# Altium PCB 检测板.PcbDoc
Units mm, origin at the board's own origin, x right, y up, seen from the top; angles counter-clockwise.
Board outline 95.25 x 7.4 mm, 2 copper layers (Top Layer, Bottom Layer); 16 components, 32 nets, 66 pads, 0 vias.
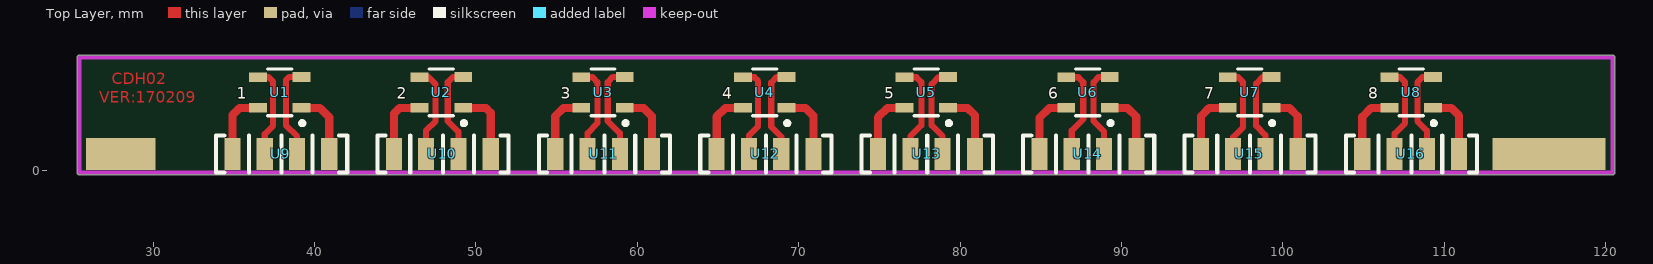
[diagram p0: Top Layer view]
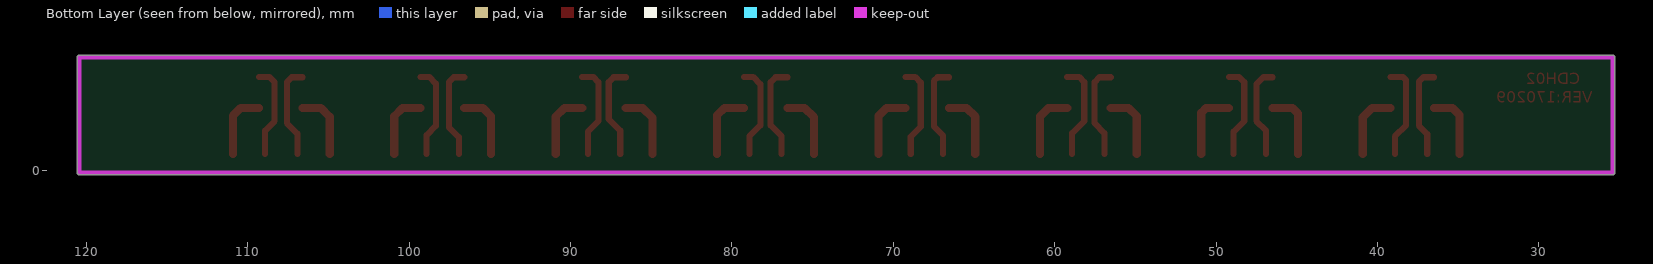
[diagram p1: Bottom Layer view, seen from below]

## Layer stack, top to bottom
Top Layer: signal copper 0.0356
Dielectric: dielectric 0.32, FR-4, Dk 4.8
Bottom Layer: signal copper 0.0356

## Board outline
25.302,-0.146 ccw(c25.43,-0.146) 25.43,-0.273 120.43,-0.273 ccw(c120.43,-0.146) 120.557,-0.146 120.557,7 ccw(c120.43,7) 120.43,7.127 25.43,7.127 ccw(c25.43,7) 25.302,7

## Design rules (kind name [scope] priority, off if disabled: settings)
Clearance [All] p1: gap=0.203
PolygonConnect [All] p1: connectstyle=Relief reliefconductorwidth=0.254 reliefentries=4 polygonreliefangle="90 Angle"
RoutingVias [All] p1: holewidth=0.711 width=1.27 viastyle="Through Hole" minholewidth=0.711 minwidth=1.27 maxholewidth=0.711 maxwidth=1.27
SilkscreenOverComponentPads [All] p1: minsilkscreentomaskgap=0.254
SolderMaskExpansion [All] p1: expansion=0.102
Width [All] p1: maxlimit=0.762 minlimit=0.254 preferedwidth=0.508
27 further rules are at their usual default settings.

## Components (designator, comment, footprint, x,y, rotation, side; value= is the part's Value field where it differs from the comment)
U1 "HW-101A" SOT-23-4 37.846,4.826 r270 top
U2 "HW-101A" SOT-23-4 47.861,4.826 r270 top
U3 "HW-101A" SOT-23-4 57.876,4.826 r270 top
U4 "HW-101A" SOT-23-4 67.891,4.826 r270 top
U5 "HW-101A" SOT-23-4 77.905,4.826 r270 top
U6 "HW-101A" SOT-23-4 87.92,4.826 r270 top
U7 "HW-101A" SOT-23-4 97.935,4.826 r270 top
U8 "HW-101A" SOT-23-4 107.95,4.826 r270 top
U9 "Header 4" PIN4 34.917,1.012 r0 top
U10 "Header 4" PIN4 44.917,1.012 r0 top
U11 "Header 4" PIN4 54.917,1.012 r0 top
U12 "Header 4" PIN4 64.917,1.012 r0 top
U13 "Header 4" PIN4 74.917,1.012 r0 top
U14 "Header 4" PIN4 84.917,1.012 r0 top
U15 "Header 4" PIN4 94.917,1.012 r0 top
U16 "Header 4" PIN4 104.917,1.012 r0 top

## Footprints (in the part's own frame and the unit in brackets; to place one, negate y for a bottom-side part, rotate by r counter-clockwise, add the part's x,y. Pads: shape width x height; smd on the part's side, far side on the other; paste and mask are expansions set on the pad)
PIN4 [mm]
  rect 1x2 smd: 1(0,0) 2(2,0) 3(4,0) 4(6,0)
  silkscreen extent -1.02,-1.14 7.11,1.14
SOT-23-4 [mm] "SOT143, 4-Leads, Body 2.9x2.9mm (max), Pitch 1.92mm"
  rect 0.6x1.1 smd: 1(0.96,1.35) 2(-0.96,1.35) 3(-0.94,-1.35) 4(0.96,-1.35)
  silkscreen extent -1.45,-0.75 2.03,1.52, body extent -1.45,-0.77 1.45,0.77, height 1.2

## Part data
U9 U10 U11 U12 U13 U14 U15 U16: "Header,"

## Free pads (board coordinates)
  rect 4.3x2 smd: 0(27.995,1.012)
  rect 7x2 smd: 0(116.489,1.012)

## Nets (pads, with @x,y where several pads share a name; then routed paths per layer and width w, separated by ;. In a path a pad name is that pad's centre, name@x,y a point inside that pad or via, vN(x,y) a via of type N, cw(c..) or ccw(c..) an arc to the next point about the centre after c; other vN are vias at no path point)
H1_IN1: U1.1 U9.4 | length 4.2
  Top Layer w0.508: U1.1 40.33,3.866 40.917,3.279 U9.4
H1_IN3: U1.3 U9.2 | length 5.8
  Top Layer w0.381: U1.3 37.16,5.766 37.44,5.486 37.44,2.769 36.917,2.246 U9.2
H1_OUT2: U1.2 U9.3 | length 5.9
  Top Layer w0.381: U9.3 38.917,2.104 38.227,2.794 38.227,5.588 38.425,5.786 U1.2
H1_OUT4: U1.4 U9.1 | length 4.2
  Top Layer w0.508: U9.1 34.917,3.421 35.362,3.866 U1.4
H2_IN1: U2.1 U10.4 | length 4.4
  Top Layer w0.508: U2.1 50.617,3.866 50.917,3.566 U10.4
H2_IN3: U2.3 U10.2 | length 5.7
  Top Layer w0.381: U2.3 47.066,5.766 47.498,5.334 47.498,3.048 46.917,2.467 U10.2
H2_OUT2: U2.2 U10.3 | length 5.8
  Top Layer w0.381: U10.3 48.917,2.391 48.26,3.048 48.26,5.461 48.585,5.786 U2.2
H2_OUT4: U2.4 U10.1 | length 4.2
  Top Layer w0.508: U10.1 44.917,3.515 45.268,3.866 U2.4
H3_IN1: U3.1 U11.4 | length 4.2
  Top Layer w0.508: U3.1 60.396,3.866 60.917,3.345 U11.4
H3_IN3: U3.3 U11.2 | length 5.8
  Top Layer w0.381: U3.3 57.226,5.766 57.531,5.461 57.531,2.921 56.917,2.307 U11.2
H3_OUT2: U3.2 U11.3 | length 6
  Top Layer w0.381: U11.3 58.917,2.297 58.166,3.048 58.166,5.461 58.491,5.786 U3.2
H3_OUT4: U3.4 U11.1 | length 4.2
  Top Layer w0.508: U11.1 54.917,3.355 55.428,3.866 U3.4
H4_IN1: U4.1 U12.4 | length 4.2
  Top Layer w0.508: U4.1 70.429,3.866 70.917,3.378 U12.4
H4_IN3: U4.3 U12.2 | length 5.8
  Top Layer w0.381: U4.3 67.259,5.766 67.484,5.541 67.484,2.714 66.917,2.147 U12.2
H4_OUT2: U4.2 U12.3 | length 5.8
  Top Layer w0.381: U12.3 68.917,2.076 68.297,2.696 68.297,5.432 68.651,5.786 U4.2
H4_OUT4: U4.4 U12.1 | length 4.2
  Top Layer w0.508: U12.1 64.917,3.322 65.461,3.866 U4.4
H5_IN1: U5.1 U13.4 | length 4.2
  Top Layer w0.508: U5.1 80.462,3.866 80.917,3.411 U13.4
H5_IN3: U5.3 U13.2 | length 5.9
  Top Layer w0.381: U5.3 77.292,5.766 77.597,5.461 77.597,2.794 76.917,2.114 U13.2
H5_OUT2: U5.2 U13.3 | length 5.8
  Top Layer w0.381: U13.3 78.917,2.109 78.232,2.794 78.232,5.334 78.684,5.786 U5.2
H5_OUT4: U5.4 U13.1 | length 4.2
  Top Layer w0.508: U13.1 74.917,3.289 75.494,3.866 U5.4
H6_IN1: U6.1 U14.4 | length 4.2
  Top Layer w0.508: U6.1 90.368,3.866 90.917,3.317 U14.4
H6_IN3: U6.3 U14.2 | length 5.9
  Top Layer w0.381: U6.3 87.325,5.766 87.63,5.461 87.63,3.175 86.917,2.462 U14.2
H6_OUT2: U6.2 U14.3 | length 5.9
  Top Layer w0.381: U14.3 88.917,2.396 88.265,3.048 88.265,5.461 88.59,5.786 U6.2
H6_OUT4: U6.4 U14.1 | length 4.1
  Top Layer w0.508: U14.1 84.917,3.256 85.527,3.866 U6.4
H7_IN1: U7.1 U15.4 | length 4.2
  Top Layer w0.508: U7.1 100.401,3.866 100.917,3.35 U15.4
H7_IN3: U7.3 U15.2 | length 5.8
  Top Layer w0.381: U7.3 97.231,5.766 97.536,5.461 97.536,2.667 96.917,2.048 U15.2
H7_OUT2: U7.2 U15.3 | length 5.7
  Top Layer w0.381: U15.3 98.917,2.175 98.341,2.751 98.341,5.377 98.75,5.786 U7.2
H7_OUT4: U7.4 U15.1 | length 4.2
  Top Layer w0.508: U15.1 94.917,3.35 95.433,3.866 U7.4
H8_IN1: U8.1 U16.4 | length 4.2
  Top Layer w0.508: U8.1 110.434,3.866 110.917,3.383 U16.4
H8_IN3: U8.3 U16.2 | length 5.8
  Top Layer w0.381: U8.3 107.264,5.766 107.569,5.461 107.569,2.921 106.917,2.269 U16.2
H8_OUT2: U8.2 U16.3 | length 5.8
  Top Layer w0.381: U16.3 108.917,2.462 108.331,3.048 108.331,5.461 108.656,5.786 U8.2
H8_OUT4: U8.4 U16.1 | length 4.2
  Top Layer w0.508: U16.1 104.917,3.317 105.466,3.866 U8.4

## Keep-outs
Keep-Out Layer:
  lines w0.254: 25.43,-0.146 120.43,-0.146 120.43,7 25.43,7 25.43,-0.146

## Other copper
Top Layer:
  text "CDH02" at 27.432,5.334 h0.7
  text "VER:170209" at 26.67,4.191 h0.7

## Silkscreen, mask and mechanical layers (free items; w line width, h text height)
Top Overlay:
  text "1" at 35.179,4.445 h0.7
  text "2" at 45.085,4.445 h0.7
  text "3" at 55.245,4.445 h0.7
  text "4" at 65.278,4.445 h0.7
  text "5" at 75.311,4.445 h0.7
  text "6" at 85.471,4.445 h0.7
  text "7" at 95.123,4.445 h0.7
  text "8" at 105.283,4.445 h0.7